# Altium PCB PCB1.PcbDoc
Units mm, origin at the board's own origin, x right, y up, seen from the top; angles counter-clockwise.
Board outline 100 x 79 mm, 2 copper layers (Top Layer, Bottom Layer); 28 components, 18 nets, 73 pads, 0 vias.
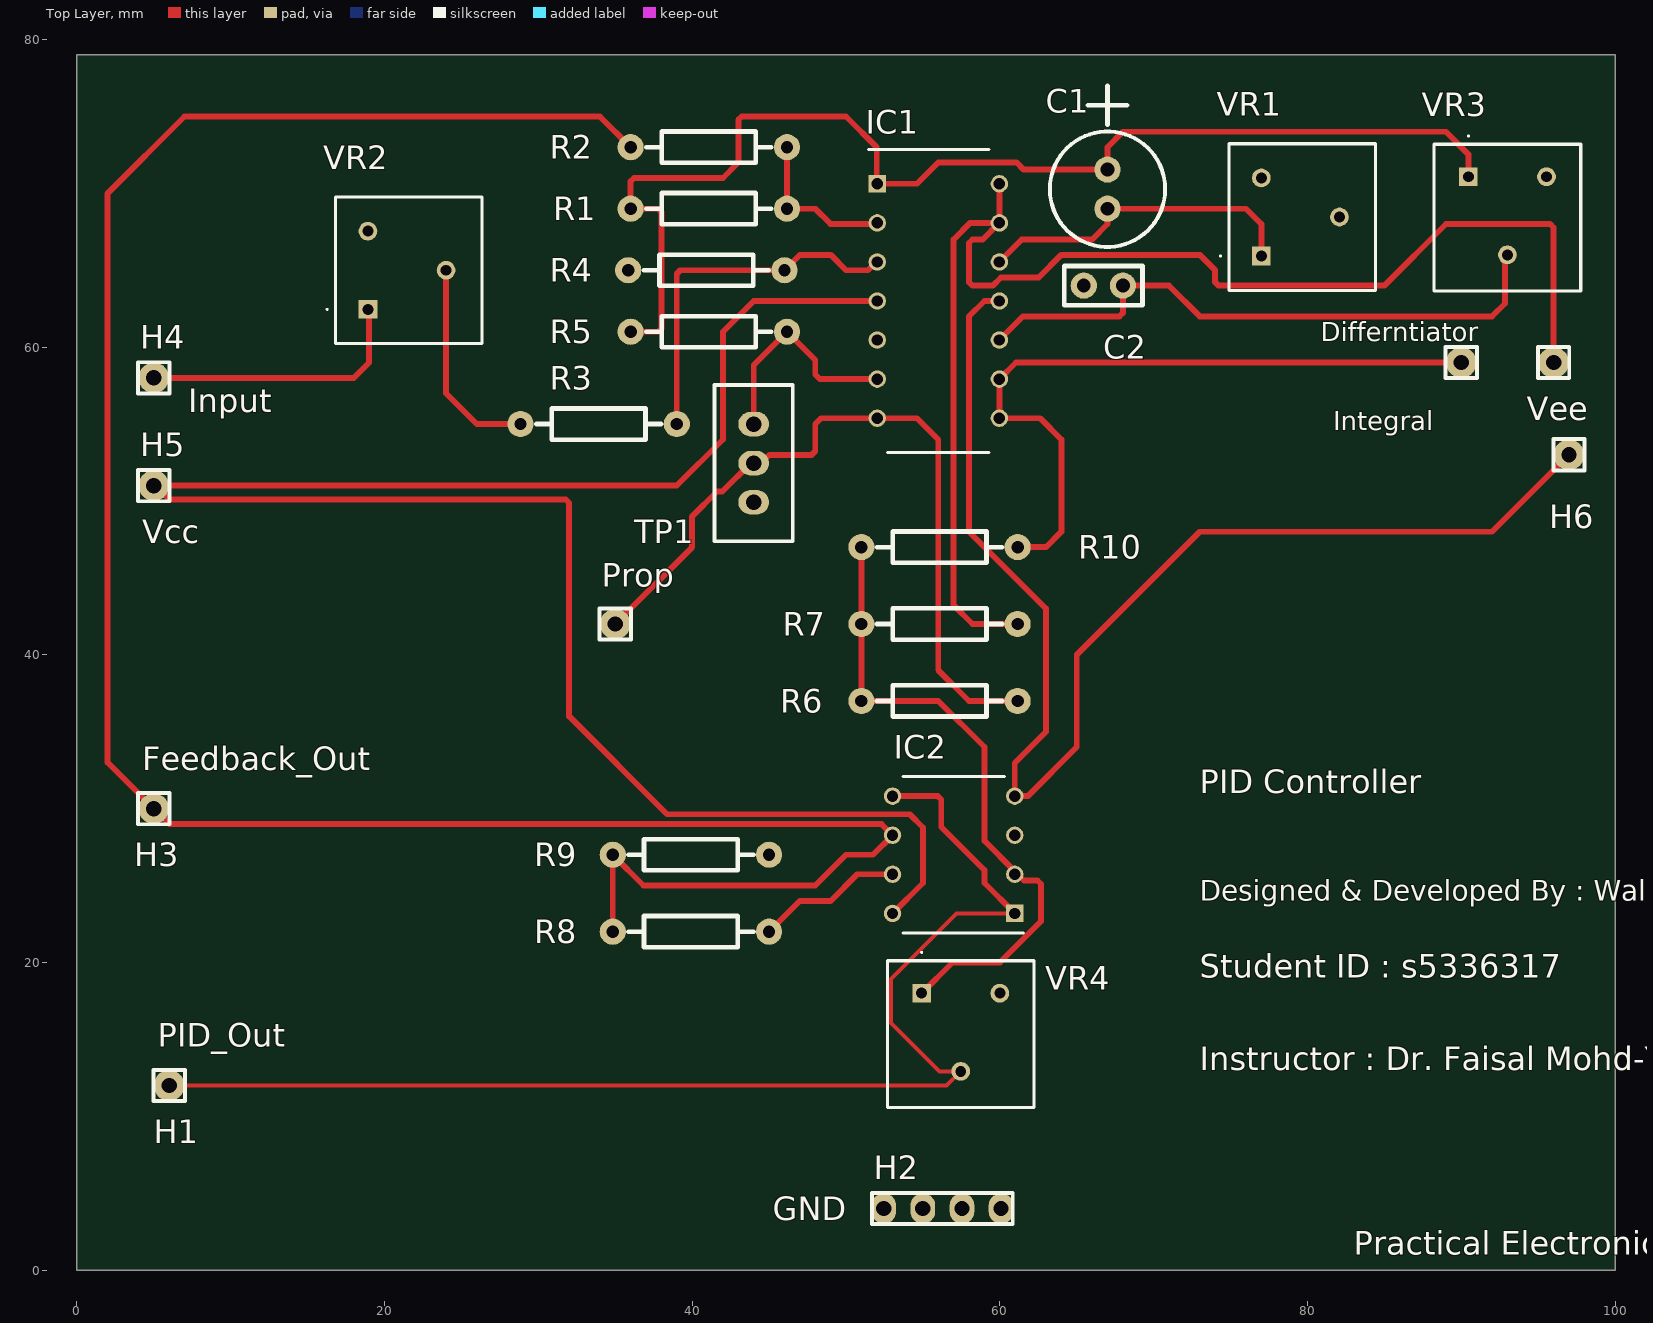
[diagram p0: Top Layer view]
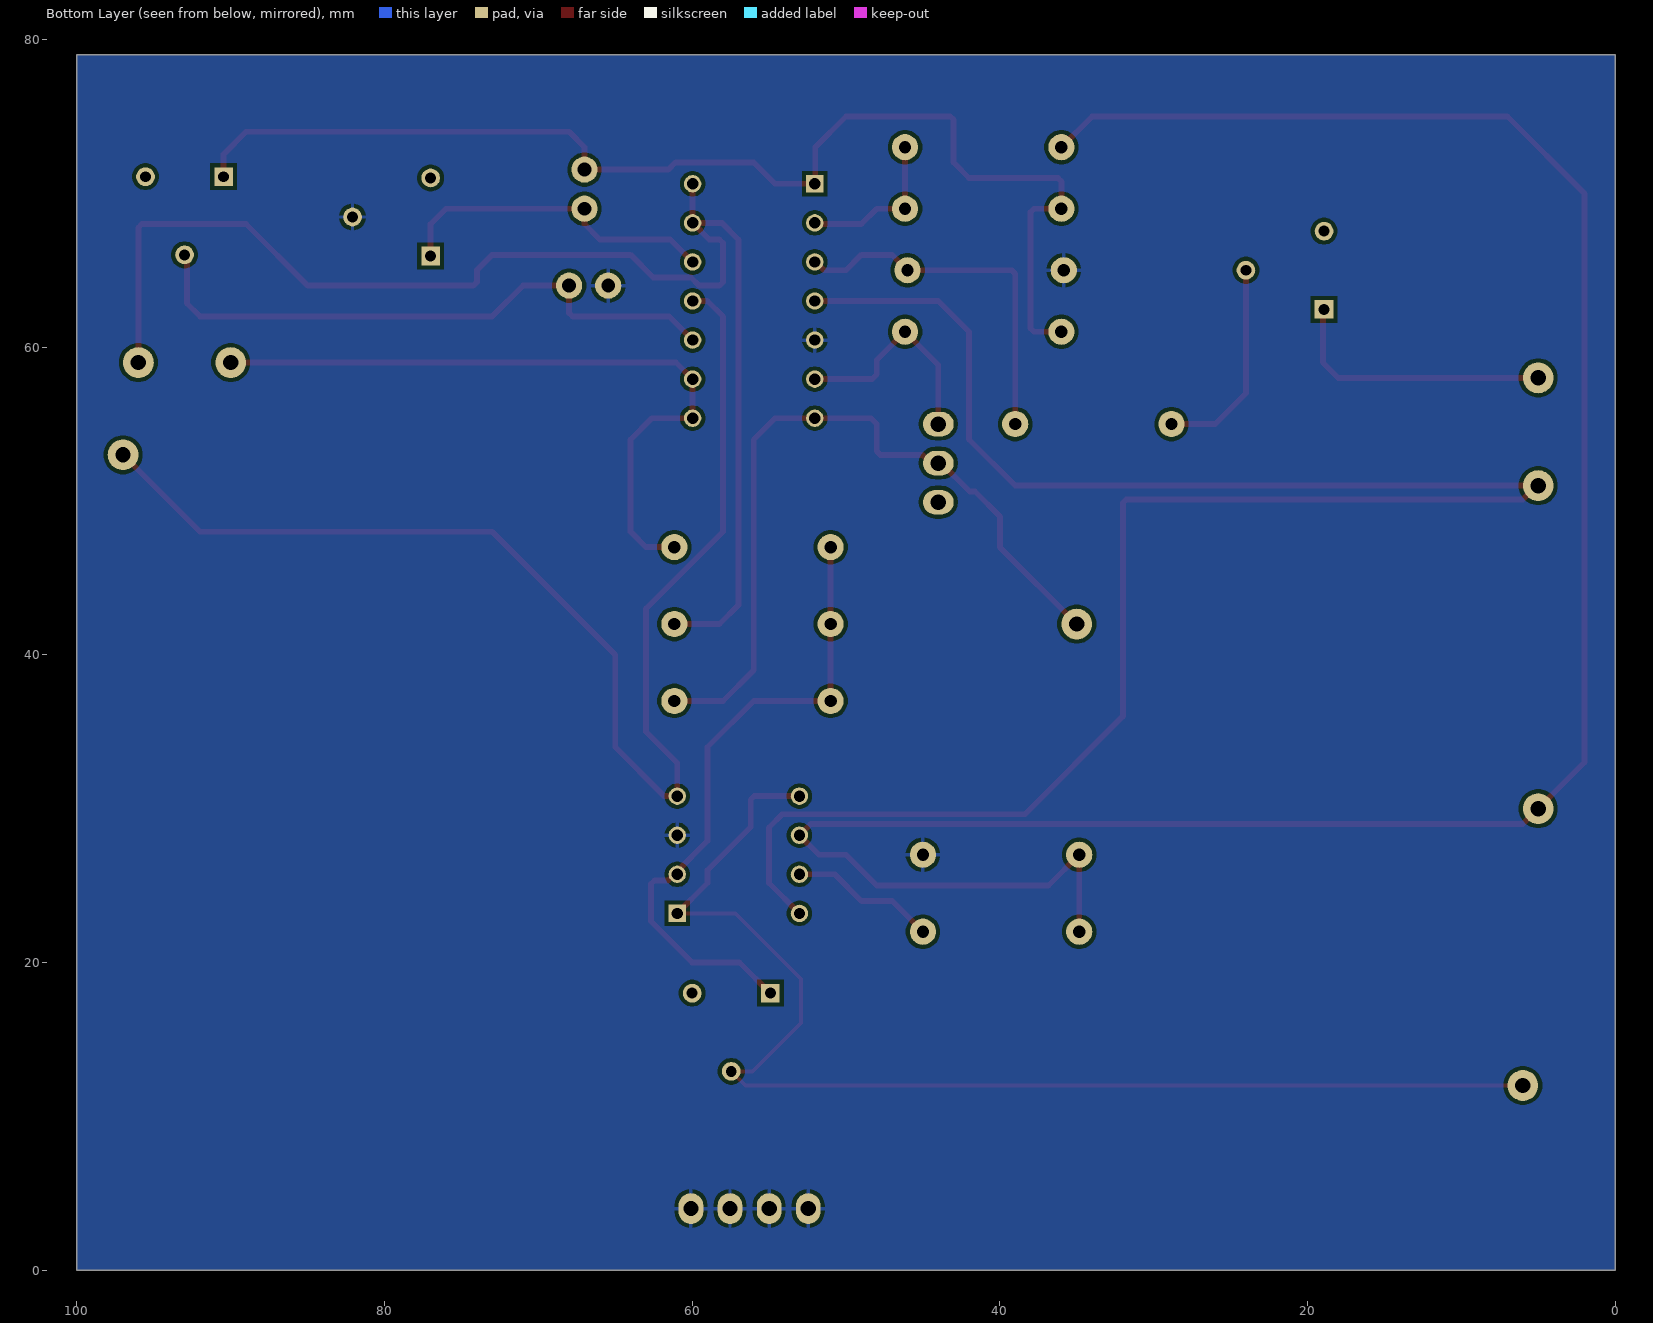
[diagram p1: Bottom Layer view, seen from below]
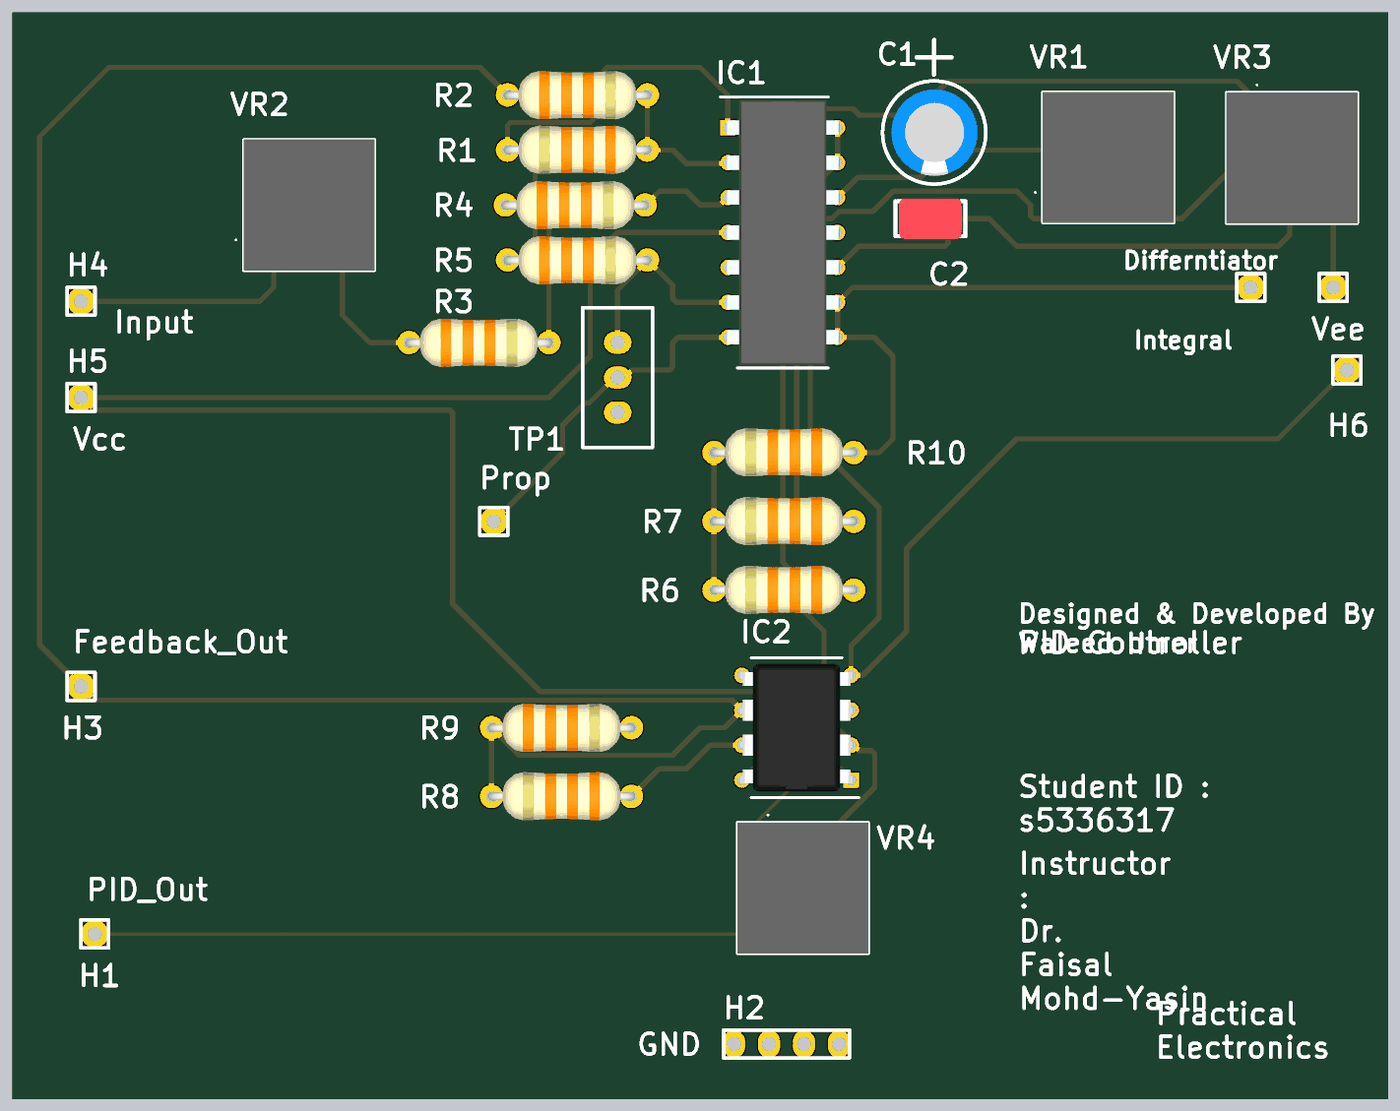
[diagram p2: 3D render of the assembled board from above, using the file's embedded part models]

## Layer stack, top to bottom
Top Solder: solder mask 0.0102, Solder Resist, Dk 3.5
Top Layer: signal copper 0.0356
Dielectric 1: dielectric 0.32, FR-4, Dk 4.8
Bottom Layer: signal copper 0.0356
Bottom Solder: solder mask 0.0102, Solder Resist, Dk 3.5

## Board outline
0,0 100,0 100,79 0,79

## Design rules (kind name [scope] priority, off if disabled: settings)
Clearance [All] p1: gap=0.254 ignorepadtopadclearanceinfootprint=TRUE except(0: Arc-Hole Track-Hole SMDPad-Hole THPad-Hole Via-Hole Fill-Hole Poly-Hole Region-Hole Text-Hole; 0.5: THPad-THPad)
HoleSize [All] p1: absolutevalues=TRUE maxlimit=6.3 minlimit=0.3 maxpercent=80.000 minpercent=20.000
HoleToHoleClearance [All] p1: gap=0.5 allowstackedmicrovias=TRUE
MinimumAnnularRing [All] p1: minimumring=0.2
PolygonConnect [All] p1: connectstyle=Relief reliefconductorwidth=0.254 reliefentries=4 polygonreliefangle="90 Angle" airgapwidth=0.254
RoutingVias [All] p1: holewidth=0.711 width=1.27 viastyle="Through Hole" minholewidth=0.711 minwidth=1.27 maxholewidth=0.711 maxwidth=1.27
SilkToSilkClearance [All] p1: silktosilkclearance=0.15
SilkToSolderMaskClearance [IsPad] p1: minsilkscreentomaskgap=0.15 clearancetoexposedcopper=TRUE
SolderMaskExpansion [All] p1: expansion=0.102 istentingtop=FALSE
Width [All] p1: maxlimit=1 minlimit=0.254 preferedwidth=0.254
26 further rules are at their usual default settings.

## Classes and differential pairs
component class Sheet1: C1 C2 H1 H2 H3 H4 H5 H6 IC1 IC2 R1 R2 R3 R4 R5 R6 R7 R8 R9 R10 TP1 VR1 VR2 VR3 VR4

## Components (designator, comment, footprint, x,y, rotation, side; value= is the part's Value field where it differs from the comment)
C1 "2.2uF" RB.1/.2 67,71.54 r0 top
C2 "0.33uF" RAD0.1 65.46,64 r0 top
Differntiator "Comment" "HEADER SINGLE" 96,59 r0 top
H1 "Header" "HEADER SINGLE" 6,12 r0 top
H2 "HEADER" "HEADER QUAD" 60.08,4 r180 top
H3 "Header" "HEADER SINGLE" 5,30 r0 top
H4 "Header" "HEADER SINGLE" 5,58 r0 top
H5 "Header" "HEADER SINGLE" 5,51 r0 top
H6 "Header" "HEADER SINGLE" 97,53 r0 top
IC1 "" DIP794W53P254L1930H508Q14N 56,63 r0 top
IC2 "TL072IP" DIP794W53P254L959H508Q8N 57,27 r180 top
Integral "Comment" "HEADER SINGLE" 90,59 r0 top
Prop "Comment" "HEADER SINGLE" 35,42 r0 top
R1 "10k" AXIAL0.4 46.16,69 r180 top
R2 "10K" AXIAL0.4 36,73 r0 top
R3 "10k" AXIAL0.4 28.84,55 r0 top
R4 "10k" AXIAL0.4 35.84,65 r0 top
R5 "12K" AXIAL0.4 36,61 r0 top
R6 "10K" AXIAL0.4 61.16,37 r180 top
R7 "10K" AXIAL0.4 61.16,42 r180 top
R8 "Rb" AXIAL0.4 45,22 r180 top
R9 "Ra" AXIAL0.4 34.84,27 r0 top
R10 "10K" AXIAL0.4 61.16,47 r180 top
TP1 "Rp" TRIMPOT 46.54,57.54 r270 top
VR1 "Rd" 3386F1104TLF 77,65.92 r90 top
VR2 "10k" 3386F1104TLF 18.92,62.46 r90 top
VR3 "Ri" 3386F1104TLF 90.46,71.08 r0 top
VR4 "Rs" 3386F1104TLF 54.92,18 r0 top

## Footprints (in the part's own frame and the unit in brackets; to place one, negate y for a bottom-side part, rotate by r counter-clockwise, add the part's x,y. Pads: shape width x height; smd on the part's side, far side on the other; paste and mask are expansions set on the pad)
3386F1104TLF [mm]
  rect 1.217x1.217 hole 0.71: 1(0,0)
  round 1.217 hole 0.71: 2(2.54,-5.08) 3(5.08,0)
  silkscreen extent -2.22,-7.42 7.3,2.7, body extent -2.22,-7.42 7.3,2.11, height 5.18
AXIAL0.4 [mm]
  round 1.7 hole 0.8: 1(0,0) 2(10.16,0)
  silkscreen extent 1.02,-1.02 9.14,1.02, body extent -0.28,-1.78 10.44,1.74, height 3.79
DIP794W53P254L959H508Q8N [mm]
  rect 1.13x1.13 hole 0.73: 1(-3.97,3.81)
  round 1.13 hole 0.73: 2(-3.97,1.27) 3(-3.97,-1.27) 4(-3.97,-3.81) 5(3.97,-3.81) 6(3.97,-1.27) 7(3.97,1.27) 8(3.97,3.81)
  silkscreen extent -4.53,-5.08 3.3,5.08, body extent -4.1,-4.64 4.1,4.64, height 4.21
DIP794W53P254L1930H508Q14N [mm]
  rect 1.13x1.13 hole 0.73: 1(-3.97,7.62)
  round 1.13 hole 0.73: 2(-3.97,5.08) 3(-3.97,2.54) 4(-3.97,0) 5(-3.97,-2.54) 6(-3.97,-5.08) 7(-3.97,-7.62) 8(3.97,-7.62) 9(3.97,-5.08) 10(3.97,-2.54) 11(3.97,0) 12(3.97,2.54) 13(3.97,5.08) 14(3.97,7.62)
  silkscreen extent -4.53,-9.84 3.3,9.84, body extent -4.1,-9.65 4.1,9.65, height 5.08
"HEADER QUAD" [mm]
  oval 1.6x2 hole 1: 1(0,0) 2(2.54,0) 3(5.08,0) 4(7.62,0)
  silkscreen extent -0.76,-1.02 8.38,1.02
"HEADER SINGLE" [mm]
  round 2 hole 1: 1(0,0)
  silkscreen extent -1.02,-1.02 1.02,1.02
RAD0.1 [mm]
  round 1.7 hole 0.9: 1(0,0) 2(2.54,0)
  silkscreen extent -1.27,-1.27 3.81,1.27, body extent -1.03,-1.5 3.57,1.5, height 7.75
RB.1/.2 [mm]
  round 1.7 hole 0.9: 1(0,0) 2(0,-2.54)
  silkscreen extent -3.75,-5.02 3.75,5.46, body extent -3.12,-4.42 3.18,1.88, height 11.5
TRIMPOT [mm]
  oval 1.6x2 hole 1: 1(2.54,-2.54) 2(5.08,-2.54) 3(7.62,-2.54)
  silkscreen extent 0,-5.08 10.16,0

## Part data
C1: library part "CAPACITOR POL", "Polarized Cap"
C2: library part CAP, "Non Polarized Cap"
H1 H3 H4 H5 H6: library part "HEADER 1", "Header single"
H2: library part "HEADER 4", "Header quad"
IC1: library part TL074CN, "Integrated Circuit", Manufacturer_Name=TEXAS, Mouser Part Number=511-TL074CN, Datasheet Link=https://www.ti.com/lit/ds/symlink/tl071h.pdf?HQS=dis-mous-null-mousermode-dsf-pf-null-wwe, Height=5.08mm, Manufacturer_Part_Number=TL074CN, Mouser Price/Stock=https://www.mouser.co.uk/ProductDetail/STMicroelectronics/TL074CN?qs=46HR8ipXVSu5lerO3SL9VA%3D%3D
IC2: "Integrated Circuit", Manufacturer_Name="Texas Instruments", Mouser Part Number=595-TL072IP, Arrow Part Number=TL072IP, Arrow Price/Stock=https://www.arrow.com/en/products/tl072ip/texas-instruments, Datasheet Link=http://www.ti.com/lit/ds/symlink/tl071a.pdf, Height=5.08mm, Manufacturer_Part_Number=TL072IP, Mouser Price/Stock=https://www.mouser.co.uk/ProductDetail/Texas-Instruments/TL072IP?qs=5BZzbFV4k2v7IBrcArRPQw%3D%3D
R1 R2 R3 R4 R5 R6 R7 R8 R9 R10: library part RES, "1/4 W Res"
TP1: library part TRIMPOT, "Rp=250K"
VR1 VR2 VR3 VR4: library part 3386F-1-104TLF, "Variable Resistor", Manufacturer_Name=Bourns, Mouser Part Number=652-3386F-1-104TLF, Arrow Part Number=3386F-1-104TLF, Arrow Price/Stock=https://www.arrow.com/en/products/3386f-1-104tlf/bourns?region=nac, Datasheet Link=https://www.bourns.com/docs/Product-Datasheets/3386.pdf, Height=5.08mm, Manufacturer_Part_Number=3386F-1-104TLF, Mouser Price/Stock=https://www.mouser.co.uk/ProductDetail/Bourns/3386F-1-104TLF?qs=jh2Y1wKDsmjfFzCYrNL%2FAQ%3D%3D

## Nets (pads, with @x,y where several pads share a name; then routed paths per layer and width w, separated by ;. In a path a pad name is that pad's centre, name@x,y a point inside that pad or via, vN(x,y) a via of type N, cw(c..) or ccw(c..) an arc to the next point about the centre after c; other vN are vias at no path point)
D_Amp_Out: C1.1 IC1.1 R1.2 R5.1 VR3.1 | length 79.2
  Top Layer w0.381: R5.1 37.777,61 38,61.223 38,68.777 37.777,69 R1.2 36,70.777 36.223,71 42,71 43,72 43,74.777 43.223,75 50,75 52,73 52,70.65 IC1.1 54.62,70.62 56,72 61.092,72 61.552,71.54 C1.1 67,73 68,74 89,74 90.46,72.54 VR3.1
Differn_Out: Differntiator.1 IC1.13 IC1.14 R7.1 | length 90.2
  Top Layer w0.381: IC1.14 IC1.13 ; R7.1 58.223,42 57,43.223 57,67 58.08,68.08 IC1.13 ; Differntiator.1 96,67.777 95.777,68 89,68 85,64 74.223,64 74,64.223 74,65 73,66 64,66 62.53,64.53 60.073,64.53 59.542,64 58.223,64 58,64.223 58,66.777 58.223,67 58.89,67 IC1.13
Feedback_Output: H3.1 IC2.6 R2.1 R8.2 R9.1 | length 152.2
  Top Layer w0.381: R8.2 R9.1 36.84,25 48,25 50,27 51.76,27 IC2.6 ; R2.1 34,75 7,75 2,70 2,33 6,29 52.3,29 IC2.6@53.005,28.295
GND: C2.1 H2.1 H2.2 H2.3 H2.4 IC1.5 IC2.3 R4.1 R9.2 VR1.2
Input: H4.1 VR2.1 | length 17.9
  Top Layer w0.381: H4.1 18,58 19,59 19,62.38 VR2.1
Integral_Out: IC1.8 IC1.9 Integral.1 R10.1 | length 46.9
  Top Layer w0.381: R10.1 63,47 64,48 64,54 62.62,55.38 IC1.8 IC1.9 61.05,59 Integral.1
NetC1_2: C1.2 IC1.12 VR1.1 | length 21.5
  Top Layer w0.381: IC1.12 61.43,67 66,67 67,68 C1.2 76,69 77,68 VR1.1
NetC2_2: C2.2 IC1.10 VR3.2 | length 39.8
  Top Layer w0.381: IC1.10 61.51,62 67.777,62 68,62.223 C2.2 71,64 73,62 92,62 92.84,62.84 92.84,65.84 VR3.2
NetIC1_2: IC1.2 R1.1 R2.2 | length 10.3
  Top Layer w0.381: R2.2 R1.1 48,69 49,68 51.95,68 IC1.2
NetIC1_3: IC1.3 R3.2 R4.2 | length 24
  Top Layer w0.381: R3.2 39,64.777 39.223,65 46.01,65 47.01,66 49,66 50,65 51.432,65 51.972,65.54 IC1.3
NetIC1_6: IC1.6 R5.2 TP1.1 | length 14.6
  Top Layer w0.381: TP1.1 44,58.84 R5.2 48,59.16 48,58.223 48.303,57.92 IC1.6
NetIC2_2: IC2.2 R6.2 R7.2 R10.2 VR4.1 | length 42.4
  Top Layer w0.381: R10.2 R7.2 R6.2 56,37 59,34 59,27.903 60.97,25.933 IC2.2 61.161,25.73 61.568,25.323 62.454,25.323 62.677,25.1 62.677,22.677 60,20 56.92,20 VR4.1
NetIC2_7: IC2.7 R8.1 | length 9.6
  Top Layer w0.381: R8.1 47,24 49,24 50.73,25.73 IC2.7
NetR3_1: R3.1 VR2.2 | length 13.7
  Top Layer w0.381: VR2.2 24,57 26,55 R3.1
PID_Output: H1.1 IC2.1 IC2.5 VR4.2 | length 83
  Top Layer w0.254: H1.1 56.54,12 VR4.2 56.08,12.92 52.93,16.07 52.93,18.93 57.19,23.19 IC2.1
  Top Layer w0.381: IC2.5 55.967,30.81 56.19,30.587 56.19,28.81 59,26 59,25.16 IC2.1
Prop_Out: IC1.7 Prop.1 R6.1 TP1.2 | length 50.3
  Top Layer w0.381: Prop.1 40,47 40,49 41.613,50.613 41.953,50.613 43.8,52.46 TP1.2 44.493,52.46 45.033,53 47.777,53 48,53.223 48,55 48.38,55.38 IC1.7 54.62,55.38 56,54 56,39 58,37 R6.1
VCC: H5.1 IC1.4 IC2.8 | length 129.8
  Top Layer w0.381: IC1.4 44,63 42,61 42,54 39,51 H5.1 5.101,51 6.004,50.097 31.777,50.097 32,49.874 32,36 38.365,29.635 54.142,29.635 55,28.777 55,25.16 IC2.8
VEE: H6.1 IC1.11 IC2.4 | length 85.2
  Top Layer w0.381: IC1.11 59,63 58,62 58,48 63,43 63,35 60.97,32.97 IC2.4 60.973,30.813 61.813,30.813 65,34 65,40 73,48 92,48 H6.1
pads on no net: TP1.3 VR1.3 VR2.3 VR3.3 VR4.3

## Polygon pours and split planes (outlines as drawn)
GND on Bottom Layer "GND_L02_P000" (solid, pour order 0): 0,0 100,0 100,79 0,79

## Silkscreen, mask and mechanical layers (free items; w line width, h text height)
Top Overlay:
  text "Input" at 7.254,55.762 h1.52
  text "Vee" at 94.254,55.254 h1.52
  text "Vcc" at 4.254,47.254 h1.52
  text "Feedback_Out" at 4.254,32.508 h1.52
  text "PID Controller" at 73,31 h1.52
  text "Designed & Developed By : Waleed Umer" at 73,24 h1.32
  text "Student ID : s5336317" at 73,19 h1.52
  text "PID_Out" at 5.254,14.508 h1.52
  text "Instructor : Dr. Faisal Mohd-Yasin" at 73,13 h1.52
  text "GND" at 45.254,3.254 h1.52
  text "Practical Electronics" at 83,1 h1.52